# Altium PCB PCB.pcbdoc
Units mil, origin at the board's own origin, x right, y up, seen from the top; angles counter-clockwise.
Board outline 2000 x 1765 mil, 2 copper layers (Top Layer, Bottom Layer); 10 components, 11 nets, 30 pads, 3 vias.
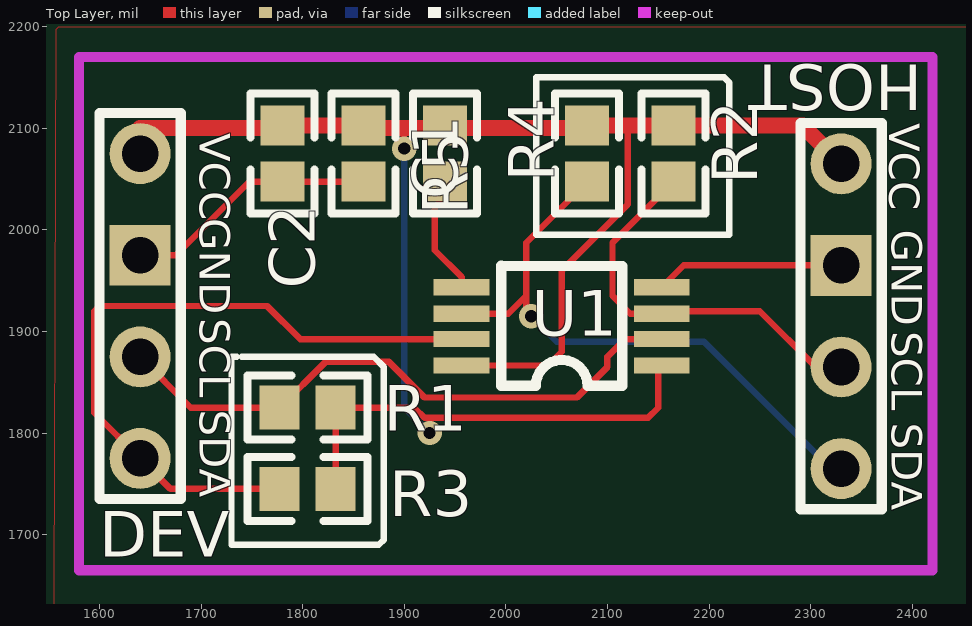
[diagram p0: Top Layer view]
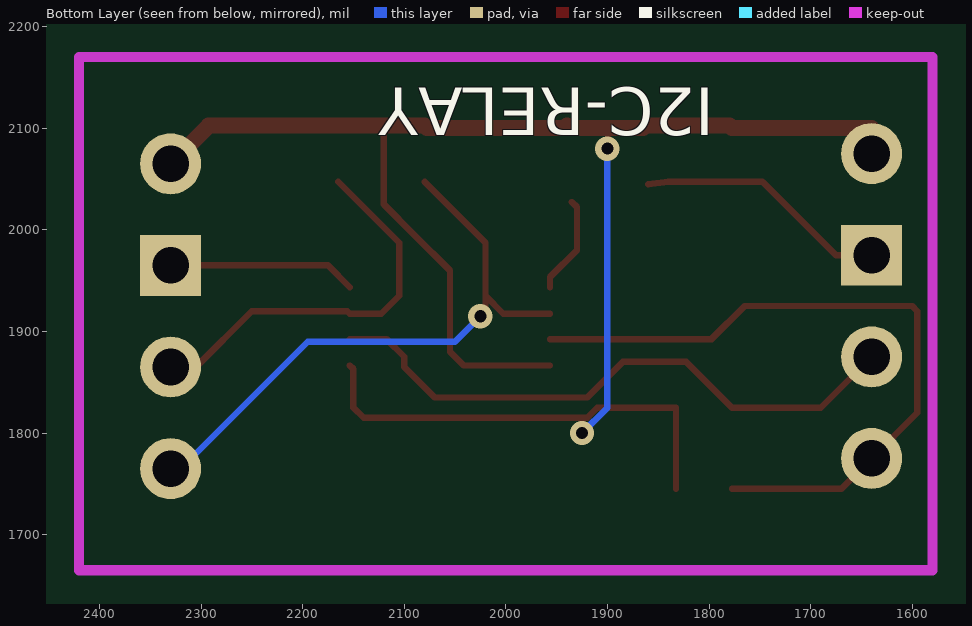
[diagram p1: Bottom Layer view, seen from below]

## Layer stack, top to bottom
Top Layer: signal copper (thickness not stored)
Dielectric: dielectric 12.6, FR-4, Dk 4.8
Bottom Layer: signal copper (thickness not stored)

## Board outline
3000,1000 1000,1000 1000,2765 3000,2765

## Components (designator, comment, footprint, x,y, rotation, side; value= is the part's Value field where it differs from the comment)
C1 "100nF" 0603 1860,2075 r270 top
C2 "10uF" 0603 1780,2075 r270 top
DEV "4PIN_I2C" 4PIN_I2C 1640,1975 r180 top
HOST "4PIN_I2C" 4PIN_I2C 2330,1965 r180 top
R1 "2.2K" 0603 1805,1825 r0 top
R2 "10K" 0603 2165,2075 r90 top
R3 "2.2K" 0603 1805,1745 r0 top
R4 "10K" 0603 2080,2075 r90 top
R5 "10K" 0603 1940,2075 r90 top
U1 "LTC4307CMS8#PBF" MSOP-8 2055,1905 r180 top

## Footprints (in the part's own frame and the unit in brackets; to place one, negate y for a bottom-side part, rotate by r counter-clockwise, add the part's x,y. Pads: shape width x height; smd on the part's side, far side on the other; paste and mask are expansions set on the pad)
4PIN_I2C [mil]
  round 60 hole 36: 1(0,200) 2(0,100) 4(0,-100)
  rect 60x60 hole 36: 3(0,0)
  silkscreen extent -40,-140 40,240
0603 [mm]
  rect 1x1.1 smd: 1(-0.7,0) 2(0.7,0)
  silkscreen extent -1.5,-0.8 1.5,0.8
MSOP-8 [mil]
  rect 55x16 smd: 1(-98.5,38.5) 2(-98.5,12.5) 3(-98.5,-12.5) 4(-98.5,-38.5) 5(98.5,-38.5) 6(98.5,-12.5) 7(98.5,12.5) 8(98.5,38.5)
  silkscreen extent -60,-60 60,59

## Via types
v1: diameter 24, hole 12, Top Layer to Bottom Layer, 3 vias

## Nets (pads, with @x,y where several pads share a name; then routed paths per layer and width w, separated by ;. In a path a pad name is that pad's centre, name@x,y a point inside that pad or via, vN(x,y) a via of type N, cw(c..) or ccw(c..) an arc to the next point about the centre after c; other vN are vias at no path point)
3.3VI2C: C1.1 C2.1 DEV.4 HOST.4 R1.2 R2.2 R3.2 R4.2 R5.2 U1.1 U1.8 | length 1866.5
  Top Layer w6.3: R3.2 R1.2 1910,1825 1920,1815 2140,1815 2150,1825 2150,1863 U1.1 ; 1899.5,2100 1899.5,2080.5 v1(1900,2080) ; v1(1925,1800) 1925.06,1800.06 1925.06,1815 ; U1.8 2041.5,1866.5 2055,1880 2055,1925 2055,1960 2090,1995 2120,2025 2120,2045 2120,2101.85 2120.71,2102.56
  Top Layer w15.75: DEV.4 1640,2100 1777.4,2100 C2.1 ; C2.1 1840,2102.56 C1.1 ; C1.1@1865,2100 R5.2@1940,2100 ; R5.2 1935,2100 2077.4,2100 R4.2 ; R4.2 R2.2 2292.44,2102.56 HOST.4
  Bottom Layer w6.3: v1(1900,2080) 1900,1825 v1(1925,1800)
GND: C1.2 C2.2 DEV.3 HOST.3 U1.4 | length 435.6
  Top Layer w6.3: DEV.3 1675,1975 1747.44,2047.44 C2.2 1840,2047.44 C1.2@1860,2045 ; U1.4 2175,1965 HOST.3
S$67: 
S$69: 
S$394: 
S$398: 
SCL0: DEV.2 R1.1 U1.2 | length 597
  Top Layer w6.3: DEV.2 1690,1825 R1.1 1822.44,1870 1885,1870 1920,1835 2070,1835 2100,1865 2100,1875 2117.5,1892.5 U1.2
SCLOUT: HOST.2 R2.1 U1.3 | length 393.4
  Top Layer w6.3: R2.1 2105,1987.44 2105,1935 2122.5,1917.5 U1.3 2156,1920 2250,1920 2305,1865 HOST.2
SDA0: DEV.1 R3.1 U1.7 | length 690.5
  Top Layer w6.3: R3.1 1700,1745 1670,1745 DEV.1 1595,1820 1595,1825 1595,1920 1600,1925 1765,1925 1797.5,1892.5 U1.7
SDAOUT: HOST.1 R4.1 U1.6 | length 597.2
  Top Layer w6.3: U1.6 2002.5,1917.5 2020,1935 ; v1(2025,1915) 2020,1920 2020,1935 ; R4.1 2020,1987.44 2020,1935
  Bottom Layer w6.3: v1(2025,1915) 2050,1890 2195,1890 2320,1765 HOST.1
U1_5: R5.1 U1.5 | length 97
  Top Layer w6.3: 1935,2027.44 1930,2022.44 1930,1980 1956.5,1953.5 U1.5

## Polygon pours and split planes (outlines as drawn)
GND on Bottom Layer (solid): 1500,1570 1500,2265 2465,2265 2465,1570 1500,1570
GND on Top Layer (solid): 1560,2200 2500,2200 2500,1500 1555,1500 1557.5,2197.5

## Silkscreen, mask and mechanical layers (free items; w line width, h text height)
Top Overlay:
  lines w6.3 net S$394: 1735,1875 1730,1875 1730,1690 1875,1690 1880,1695 1880,1865 1870,1875 1740,1875
  lines w6.3 net S$398: 2030,1995 2220,1995 2220,2145 2215,2150 2030,2150 2030,1995
Bottom Overlay:
  text "I2C-RELAY" at 1795,2155 h80 r180
Document:
  lines w0.1: 1999,1881.5 2001,1883.5

## Text inside footprints (layer, text, board x,y; h text height)
DEV: Top Overlay "VCC" at 1698.6,2094.9 h30 r270; Top Overlay "GND" at 1698.6,2011.6 h30 r270; Top Overlay "SCL" at 1698.6,1913 h30 r270; Top Overlay "SDA" at 1698.6,1823 h30 r270
HOST: Top Overlay "VCC" at 2377.3,2105 h30 r270; Top Overlay "GND" at 2380,2000 h30 r270; Top Overlay "SCL" at 2380,1900 h30 r270; Top Overlay "SDA" at 2380,1810 h30 r270